# Altium PCB TestNumPad_r1.PcbDoc
Units mm, origin at the board's own origin, x right, y up, seen from the top; angles counter-clockwise.
Board outline 85.73 x 138.11 mm, 2 copper layers (Top Layer, Bottom Layer), stack 1.58 mm thick; 98 components, 71 nets, 430 pads, 19 vias.
Unrouted connection lines stored in the file: 205.
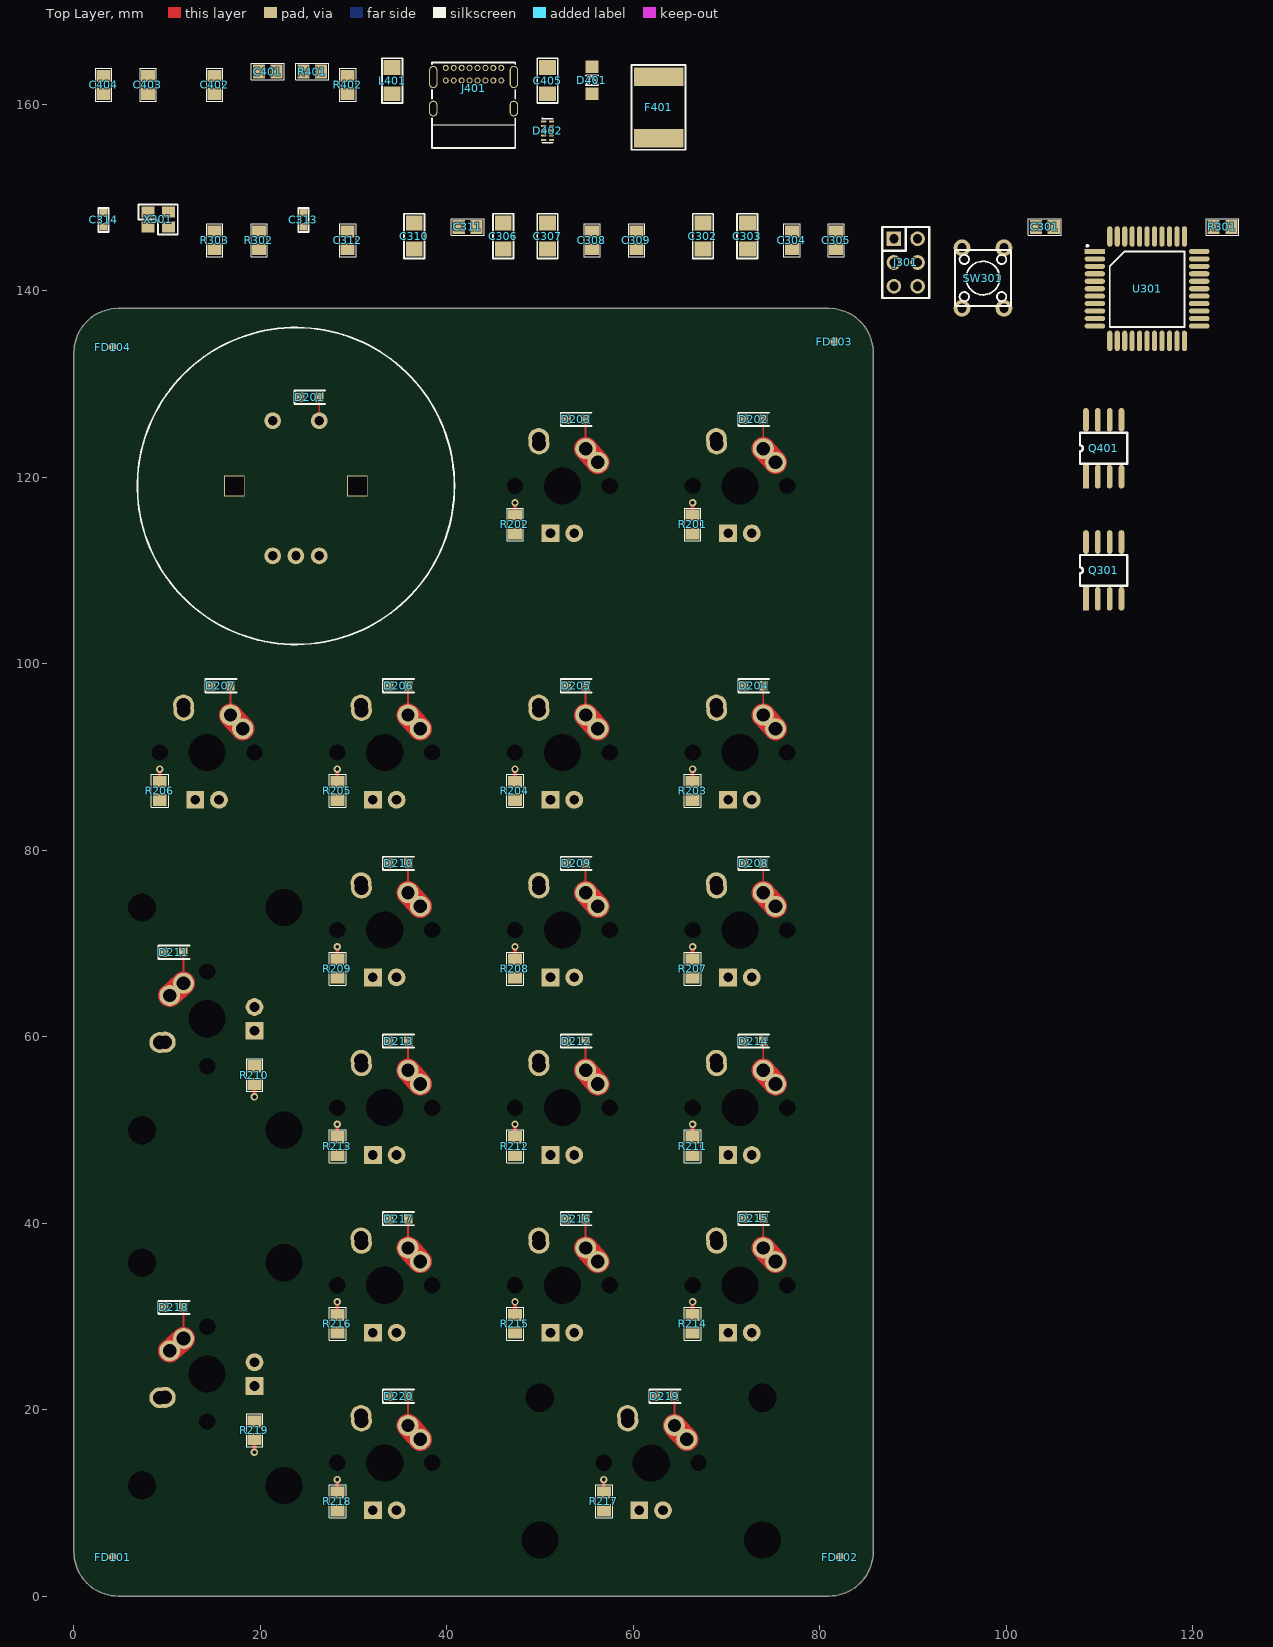
[diagram p0: Top Layer view]
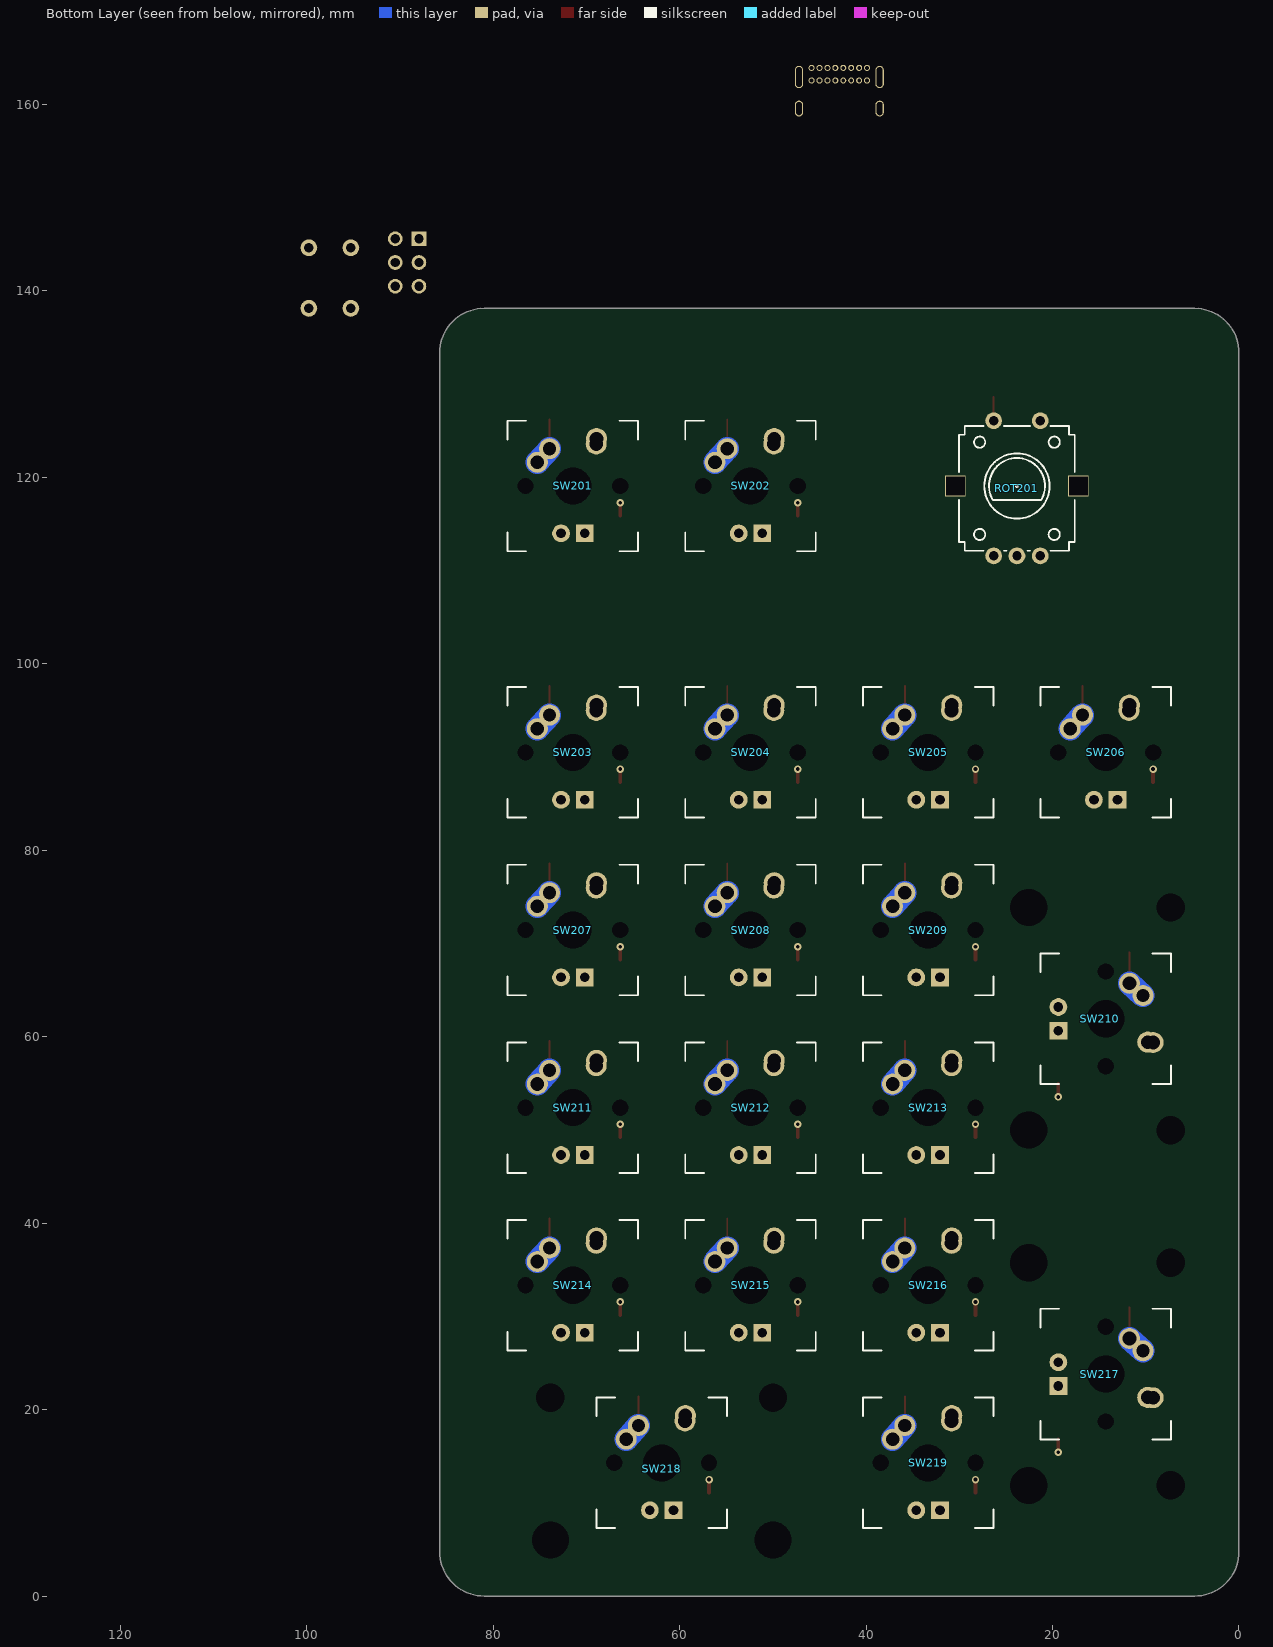
[diagram p1: Bottom Layer view, seen from below]

## Layer stack, top to bottom
Top Solder: solder mask 0.0102, Solder Resist, Dk 3.5
Top Layer: signal copper 0.0356
Dielectric 1: dielectric 1.5086, FR-4, Dk 4.8
Bottom Layer: signal copper 0.0356
Bottom Solder: solder mask 0.0102, Solder Resist, Dk 3.5

## Board outline
0,4.763 ccw(c4.763,4.763) 4.763,0 80.962,0 ccw(c80.962,4.763) 85.725,4.763 85.725,133.35 ccw(c80.962,133.35) 80.962,138.112 4.763,138.112 ccw(c4.763,133.35) 0,133.35

## Design rules (kind name [scope] priority, off if disabled: settings)
BoardOutlineClearance [All] p1: gap=0.381 ignorepadtopadclearanceinfootprint=FALSE
Clearance [All] p1: gap=0.152 ignorepadtopadclearanceinfootprint=FALSE except(0: Arc-Hole Track-Hole SMDPad-Hole THPad-Hole Via-Hole Fill-Hole Poly-Hole Region-Hole Text-Hole)
ComponentClearance ComponentClearance_Matrix [InComponentClass('U_Matrix') vs InComponentClass('U_Matrix')] p1: gap=0 collisioncheckmode=3 verticalgap=0 showdistances=FALSE
ComponentClearance [All] p2: gap=0.025 collisioncheckmode=3 verticalgap=0.025 showdistances=FALSE
DiffPairsRouting [All] p1: maxlimit=10 minlimit=0.152 mostfreqgap=0.203 toplayer_minwidth=0.152 toplayer_maxwidth=0.381 toplayer_prefwidth=0.203 bottomlayer_minwidth=0.152 bottomlayer_maxwidth=0.381 bottomlayer_prefwidth=0.203 maxuncoupledlength=12.7
HoleSize [All] p1: absolutevalues=TRUE maxlimit=6.731 minlimit=0.33 maxpercent=80.000 minpercent=20.000
HoleToHoleClearance [All] p1: gap=0.254 allowstackedmicrovias=FALSE
MinimumAnnularRing [All] p1: minimumring=0.178
MinimumSolderMaskSliver [All] p1: minsoldermaskwidth=0
PlaneClearance [All] p1: clearance=0.254
PlaneConnect [All] p1: planeconnectstyle=Direct reliefexpansion=0.406 reliefentries=4 reliefconductorwidth=0.152 reliefairgap=0.152
PolygonConnect [All] p1: connectstyle=Relief reliefconductorwidth=0.203 reliefentries=4 polygonreliefangle="90 Angle" airgapwidth=0.152
RoutingCorners [All] p1: cornerstyle=45-Degree minsetback=1.25 maxsetback=1.25
RoutingVias [All] p1: holewidth=0.4 width=0.8 viastyle="Through Hole" minholewidth=0.3 minwidth=0.6 maxholewidth=2.54 maxwidth=2.896
SilkToSilkClearance [All] p1: silktosilkclearance=0
SilkToSolderMaskClearance [IsPad] p1: minsilkscreentomaskgap=0.152 clearancetoexposedcopper=TRUE
SolderMaskExpansion [All] p1: expansion=0.075
Width [All] p1: maxlimit=4 minlimit=0.152 preferedwidth=0.2
20 further rules are at their usual default settings.

## Classes and differential pairs
component class U_USB-C_(TH): C401 C402 C403 C404 C405 D401 D402 F401 J401 L401 Q401 R401 R402
component class U_MCU: C301 C302 C303 C304 C305 C306 C307 C308 C309 C310 C311 C312 C313 C314 J301 Q301 R301 R302 R303 SW301 U301 X301
component class "Top Sheet": FD101 FD102 FD103 FD104
component class U_Matrix: D201 D202 D203 D204 D205 D206 D207 D208 D209 D210 D211 D212 D213 D214 D215 D216 D217 D218 D219 D220 R201 R202 R203 R204 R205 R206 R207 R208 R209 R210 R211 R212 R213 R214 R215 R216 R217 R218 R219 ROT201 SW201 SW202 SW203 SW204 SW205 SW206 SW207 SW208 SW209 SW210 SW211 SW212 SW213 SW214 SW215 SW216 SW217 SW218 SW219

## Components (designator, comment, footprint, x,y, rotation, side; value= is the part's Value field where it differs from the comment)
C301 "330pF" "2012C (0805)" 103.188,146.844 r0 top
C302 "10μF" "3216C (1206)" 67.469,144.463 r90 top
C303 "10μF" "3216C (1206)" 72.231,144.463 r90 top
C304 "100nF" "2012C (0805)" 76.994,144.463 r90 top
C305 "100nF" "2012C (0805)" 81.756,144.463 r90 top
C306 "10μF" "3216C (1206)" 46.038,144.463 r90 top
C307 "10μF" "3216C (1206)" 50.8,144.463 r90 top
C308 "100nF" "2012C (0805)" 55.562,144.463 r90 top
C309 "100nF" "2012C (0805)" 60.325,144.463 r90 top
C310 "10μF" "3216C (1206)" 36.512,144.463 r90 top
C311 "100nF" "2012C (0805)" 41.275,146.844 r0 top
C312 "100nF" "2012C (0805)" 29.369,144.463 r90 top
C313 "20pF" "1608C (0603)" 24.606,146.844 r90 top
C314 "20pF" "1608C (0603)" 3.175,146.844 r90 top
C401 "NF" "2012C (0805)" 19.844,163.512 r0 top
C402 "NF" "2012C (0805)" 15.081,161.131 r90 top
C403 "NF" "2012C (0805)" 7.938,161.131 r90 top
C404 "NF" "2012C (0805)" 3.175,161.131 r90 top
C405 "10μF" "3216C (1206)" 50.8,161.131 r90 top
D201 "BAS316" SOD110/SOD323 26.312,128.588 r180 top
D202 "BAS316" SOD110/SOD323 73.938,126.206 r180 top
D203 "BAS316" SOD110/SOD323 54.888,126.206 r180 top
D204 "BAS316" SOD110/SOD323 73.938,97.631 r180 top
D205 "BAS316" SOD110/SOD323 54.888,97.631 r180 top
D206 "BAS316" SOD110/SOD323 35.838,97.631 r180 top
D207 "BAS316" SOD110/SOD323 16.788,97.631 r180 top
D208 "BAS316" SOD110/SOD323 73.938,78.581 r180 top
D209 "BAS316" SOD110/SOD323 54.888,78.581 r180 top
D210 "BAS316" SOD110/SOD323 35.838,78.581 r180 top
D211 "BAS316" SOD110/SOD323 11.746,69.056 r180 top
D212 "BAS316" SOD110/SOD323 54.888,59.531 r180 top
D213 "BAS316" SOD110/SOD323 35.838,59.531 r180 top
D214 "BAS316" SOD110/SOD323 73.938,59.531 r180 top
D215 "BAS316" SOD110/SOD323 73.938,40.513 r180 top
D216 "BAS316" SOD110/SOD323 54.888,40.481 r180 top
D217 "BAS316" SOD110/SOD323 35.838,40.481 r180 top
D218 "BAS316" SOD110/SOD323 11.746,30.956 r180 top
D219 "BAS316" SOD110/SOD323 64.413,21.431 r180 top
D220 "BAS316" SOD110/SOD323 35.838,21.431 r180 top
D401 "SMF9.0CA" SOD-123FL 55.562,161.131 r90 top
D402 "TPD4E05U06DQAR" USON-10 50.8,157.162 r0 top
F401 "0ZCF0050FF2C" "7351 (2920)" 62.706,156.369 r90 top
FD101 "Fiducial" Fiducial 4.167,4.167 r0 top
FD102 "Fiducial" Fiducial 82.153,4.167 r90 top
FD103 "Fiducial" Fiducial 81.558,134.541 r90 top
FD104 "Fiducial" Fiducial 4.167,133.945 r90 top
J301 "3x2" Header-3x2-NoMod 87.947,145.574 r0 top
J401 "2073-USB4085-GF-ACT" "USB-C (2.0,TH)" 42.862,159.544 r0 top
L401 "60R" "3216 (1206)" 34.131,161.131 r90 top
Q301 "FDS4435BZ" SO8-150/200mil-GDS 108.545,106.958 r90 top
Q401 "FDS4435BZ" SO8-150/200mil-GDS 108.545,120.055 r90 top
R201 "360R" 2012R-360 66.358,113.983 r90 top
R202 "360R" 2012R-360 47.307,113.983 r90 top
R203 "360R" 2012R-360 66.358,87.307 r270 top
R204 "360R" 2012R-360 47.307,87.307 r270 top
R205 "360R" 2012R-360 28.258,87.307 r270 top
R206 "360R" 2012R-360 9.207,87.307 r270 top
R207 "360R" 2012R-360 66.358,68.257 r270 top
R208 "360R" 2012R-360 47.307,68.257 r270 top
R209 "360R" 2012R-360 28.258,68.257 r270 top
R210 "360R" 2012R-360 19.367,54.933 r90 top
R211 "360R" 2012R-360 66.358,49.207 r270 top
R212 "360R" 2012R-360 47.307,49.207 r270 top
R213 "360R" 2012R-360 28.258,49.207 r270 top
R214 "360R" 2012R-360 66.358,30.157 r270 top
R215 "360R" 2012R-360 47.307,30.157 r270 top
R216 "360R" 2012R-360 28.258,30.157 r270 top
R217 "360R" 2012R-360 56.832,11.107 r270 top
R218 "360R" 2012R-360 28.258,11.107 r270 top
R219 "360R" 2012R-360 19.367,16.833 r90 top
R301 "10K" 2012R-10K 122.237,146.844 r0 top
R302 "22R" 2012R-22 19.844,144.463 r90 top
R303 "22R" 2012R-22 15.081,144.463 r90 top
R401 "5K1" 2012R-5K1 24.606,163.512 r0 top
R402 "5K1" 2012R-5K1 29.369,161.131 r90 top
ROT201 "PEC12R-4120F-S0012" PEC12R-4xxxF-Sxxxx-NoMod 23.812,111.562 r180 bottom locked
SW201 "MX_Apls" MX-1U 71.438,119.062 r180 bottom locked
SW202 "MX_Apls" MX-1U 52.387,119.062 r180 bottom locked
SW203 "MX_Apls" MX-1U 71.438,90.487 r180 bottom locked
SW204 "MX_Apls" MX-1U 52.387,90.487 r180 bottom locked
SW205 "MX_Apls" MX-1U 33.337,90.487 r180 bottom locked
SW206 "MX_Apls" MX-1U 14.287,90.487 r180 bottom locked
SW207 "MX_Apls" MX-1U 71.438,71.438 r180 bottom locked
SW208 "MX_Apls" MX-1U 52.387,71.438 r180 bottom locked
SW209 "MX_Apls" MX-1U 33.337,71.438 r180 bottom locked
SW210 "MX_Apls" MX-2U 14.287,61.912 r270 bottom locked
SW211 "MX_Apls" MX-1U 71.438,52.387 r180 bottom locked
SW212 "MX_Apls" MX-1U 52.387,52.387 r180 bottom locked
SW213 "MX_Apls" MX-1U 33.337,52.387 r180 bottom locked
SW214 "MX_Apls" MX-1U 71.438,33.337 r180 bottom locked
SW215 "MX_Apls" MX-1U 52.387,33.337 r180 bottom locked
SW216 "MX_Apls" MX-1U 33.337,33.337 r180 bottom locked
SW217 "MX_Apls" MX-2U 14.287,23.812 r270 bottom locked
SW218 "MX_Apls" MX-2U 61.912,14.287 r180 bottom locked
SW219 "MX_Apls" MX-1U 33.337,14.287 r180 bottom locked
SW301 "RESET" SW_PB6x6 95.25,138.112 r90 top
U301 "ATMEGA32U4-AU" TQFP-44-0.8 109.5,144.22 r0 top
X301 "16.0MHz" Crystal_4-SMD 7.938,146.844 r0 top

## Footprints (in the part's own frame and the unit in brackets; to place one, negate y for a bottom-side part, rotate by r counter-clockwise, add the part's x,y. Pads: shape width x height; smd on the part's side, far side on the other; paste and mask are expansions set on the pad)
"1608C (0603)" [mm] "SMD chip component in 1608 (0603) package"
  rect 0.8x0.8 smd: 1(0,0) 2(1.5,0)
  silkscreen extent -0.55,-0.55 2.05,0.55, body extent -0.03,-0.39 1.57,0.41, height 0.9
"2012C (0805)" [mm] "2012 (0805) Footprint"
  rect 1.3x1.5 smd: 1(0,0) 2(1.9,0)
  silkscreen extent -0.81,-0.89 2.72,0.89, body extent -0.03,-0.62 1.97,0.63, height 1.25
2012R-5K1 [mm] "RESISTOR 0805"
  rect 1.3x1.5 smd: 1(0,0) 2(1.9,0)
  silkscreen extent -0.81,-0.89 2.72,0.89, body extent -0.08,-0.64 1.98,0.64, height 0.69
2012R-10K [mm] "RESISTOR 0805"
  rect 1.3x1.5 smd: 1(0,0) 2(1.9,0)
  silkscreen extent -0.81,-0.89 2.72,0.89, body extent -0.08,-0.64 1.98,0.64, height 0.69
2012R-22 [mm] "RESISTOR 0805"
  rect 1.3x1.5 smd: 1(0,0) 2(1.9,0)
  silkscreen extent -0.81,-0.89 2.72,0.89, body extent -0.08,-0.64 1.98,0.64, height 0.69
2012R-360 [mm] "RESISTOR 0805"
  rect 1.3x1.5 smd: 1(0,0) 2(1.9,0)
  silkscreen extent -0.81,-0.89 2.72,0.89, body extent -0.08,-0.64 1.98,0.64, height 0.69
"3216 (1206)" [mm] "SMD chip component in 3216 (1206) package"
  rect 1.6x1.8 smd: 1(0,0) 2(2.8,0)
  silkscreen extent -1,-1.1 3.8,1.1, body extent -0.15,-0.77 2.95,0.78, height 0.55
"3216C (1206)" [mm] "SMD chip component in 3216 (1206) package"
  rect 1.6x1.8 smd: 1(0,0) 2(2.8,0)
  silkscreen extent -1,-1.1 3.8,1.1, body extent -0.18,-0.8 3.02,0.8, height 1.8
"7351 (2920)" [mm]
  rect 2x5.3 smd: 1(0,0) 2(6.6,0)
  silkscreen extent -1.25,-2.9 7.85,2.9, body extent -0.69,-2.72 7.29,2.72, height 1.15
Crystal_4-SMD [mm]
  rect 1.4x1.15 smd mask+0.05: 1(0,0) 2(2.2,0) 3(2.2,1.6) 4(0,1.6)
  silkscreen extent -1,-0.8 3.2,2.4, body extent -0.5,-0.45 2.7,2.05, height 0.8
Fiducial [mm]
  round 1 smd paste-1 mask+0.5: ""(0,0)
Header-3x2-NoMod [mil] "0.1 Inch Header, 2 Row, 3 Way"
  rect 62x62 hole 39: 1(0,0)
  round 62 hole 39: 2(0,-100) 3(0,-200) 4(100,-200) 5(100,-100) 6(100,0)
  silkscreen extent -50,-250 150,50, body extent -51,-251 149,49, height 362
MX-1U [mm]
  round 2.25 hole 1.47: 1(-3.81,2.54) 2(2.5,4.5) 2(2.54,5.08)
  round 2.25 hole 1.42: 1(-2.5,4)
  round 1.905 hole 1.04: 3(-1.27,-5.08)
  rect 1.905x1.905 hole 1.04: 4(1.27,-5.08)
  round 1.524 hole 1.75 unplated: M(-5.08,0) M(5.08,0)
  round 1.524 hole 3.988 unplated: M(0,0)
  Top Layer lines w2.5: -2.5,4 -3.812,2.542
  Bottom Layer lines w2.5: -2.5,4 -3.812,2.542
  silkscreen extent -7,-7 7,7
MX-2U [mil]
  round 88.58 hole 57.87: 1(-150,100) 2(98.43,177.17) 2(100,200)
  round 88.58 hole 55.91: 1(-98.43,157.48)
  round 75 hole 40.94: 3(-50,-200)
  rect 75x75 hole 40.94: 4(50,-200)
  round 60 hole 68.9 unplated: M(-200,0) M(200,0)
  round 60 hole 157 unplated: M(0,0) S(-470,-325) S(470,-325)
  round 60 hole 120 unplated: S(-470,275) S(470,275)
  Top Layer lines w98.43: -98.43,157.48 -150.09,100.08
  Bottom Layer lines w98.43: -98.43,157.48 -150.09,100.08
  silkscreen extent -276,-276 276,276
PEC12R-4xxxF-Sxxxx-NoMod [mm] "Burns 12mmx13mm rotary encoder, vertical, with switch"
  round 1.8 hole 1: 1(-2.5,14.5) 2(2.5,14.5) A(-2.5,0) B(2.5,0) C(0,0)
  rect 2.2x2.3 hole 2 square: M1(-6.6,7.5) M2(6.6,7.5)
  silkscreen extent -9.6,0.55 6.2,16.3, body extent -0.2,7.3 0.2,7.7, height 0.1
SO8-150/200mil-GDS [mil]
  oval 100x24 smd: D(240,-150) D(240,-100) D(240,-50) D(240,0) G(0,-150) S(0,-50) S(0,-100)
  rect 100x24 smd: S(0,0)
  silkscreen extent 55,-175 185,25, body extent 2,-171 238,22, height 64
SOD110/SOD323 [mil]
  rect 36x40 smd: A(0,0) K(80,0)
  silkscreen extent -25,-28 105,28, body extent -10,-27 89,27, height 39
SOD-123FL [mm]
  rect 1.3x1.4 smd mask+0.07: A(0,0) K(2.9,0)
  silkscreen extent 0.95,-0.65 1.95,0.65, body extent -0.35,-0.83 3.25,0.82, height 0.95
SW_PB6x6 [mm] "6mm square tact switch"
  round 1.8 hole 1: 1(0,0) 2(6.5,0) 3(0,-4.5) 4(6.5,-4.5)
  silkscreen extent 0.25,-5.25 6.25,0.75, body extent -0.52,-5.26 7.17,0.74, height 4.95
TQFP-44-0.8 [mm] "0.8mm Pitch 44pin TQFP"
  rect 2.2x0.55 smd mask+0.05: 1(0,0)
  rrect100% 2.2x0.55 smd mask+0.05: 2(0,-0.8) 3(0,-1.6) 4(0,-2.4) 5(0,-3.2) 6(0,-4) 7(0,-4.8) 8(0,-5.6) 9(0,-6.4) 10(0,-7.2) 11(0,-8) 23(11.2,-8) 24(11.2,-7.2) 25(11.2,-6.4) 26(11.2,-5.6) 27(11.2,-4.8) 28(11.2,-4) 29(11.2,-3.2) 30(11.2,-2.4) 31(11.2,-1.6) 32(11.2,-0.8) 33(11.2,0)
  rrect100% 0.55x2.2 smd mask+0.05: 12(1.6,-9.6) 13(2.4,-9.6) 14(3.2,-9.6) 15(4,-9.6) 16(4.8,-9.6) 17(5.6,-9.6) 18(6.4,-9.6) 19(7.2,-9.6) 20(8,-9.6) 21(8.8,-9.6) 22(9.6,-9.6) 34(9.6,1.6) 35(8.8,1.6) 36(8,1.6) 37(7.2,1.6) 38(6.4,1.6) 39(5.6,1.6) 40(4.8,1.6) 41(4,1.6) 42(3.2,1.6) 43(2.4,1.6) 44(1.6,1.6)
  silkscreen extent -0.9,-8.1 9.6,0.7, body extent -0.4,-10 11.6,2, height 1.18
"USB-C (2.0,TH)" [mm] "Foortprint for the TH USB2.0 type C connector USB4085-GF-A"
  round 0.65 hole 0.4 mask+0.05: A1(-2.975,4.36) A4(-2.125,4.36) A5(-1.275,4.36) A6(-0.425,4.36) A7(0.425,4.36) A8(1.275,4.36) A9(2.125,4.36) A12(2.975,4.36) B1(2.975,3.01) B4(2.125,3.01) B5(1.275,3.01) B6(0.425,3.01) B7(-0.425,3.01) B8(-1.275,3.01) B9(-2.125,3.01) B12(-2.975,3.01)
  oval 0.9x1.7 hole 1.4 slot 0.6 at 0 deg mask+0.05: SHEILD(-4.325,0) SHEILD(4.325,0)
  oval 0.9x2.4 hole 2.1 slot 0.6 at 0 deg mask+0.05: SHEILD(-4.325,3.38) SHEILD(4.325,3.38)
  silkscreen extent -4.47,-4.25 4.47,4.92, body extent -4.51,-4.25 4.52,4.92, height 3.49
USON-10 [mm] "USON-10"
  rrect40% 0.565x0.2 smd mask+0.07: 1(-0.417,1) 2(-0.417,0.5) 4(-0.417,-0.5) 5(-0.417,-1) 6(0.417,-1) 7(0.417,-0.5) 9(0.417,0.5) 10(0.417,1)
  rrect40% 0.565x0.4 smd paste-0.02 mask+0.07: 3(-0.417,0) 8(0.417,0)
  silkscreen extent -0.55,-1.3 0.55,1.4, body extent -0.5,-1.25 0.51,1.25, height 0.53

## Part data
C301: library part "2012C-330pF (NPO)", "Capacitor MLCC 50V C0G (NP0) ±10%"
C302 C303 C306 C307 C310 C405: library part 3216C-10uF, "3216, 25V MLCC X5R CAPACITOR"
C304 C305 C308 C309 C311 C312 C401 C402 C403 C404: library part 2012C-100nF, "2012 100nF MLCC Capacitor 50V X7R"
C313 C314: library part "1608C-20pF (NPO)", "Capacitor MLCC 50V C0G (NP0) ±10%", Supplier Part Number 1=311-4221-6-ND, Supplier 1=Digi-Key
D201 D202 D203 D204 D205 D206 D207 D208 D209 D210 D211 D212 D213 D214 D215 D216 D217 D218 D219 D220: library part Diode-BAS316, "Signal diode, 100V, 250mA, 400mW"
D401: library part Diode-TVS-SMF9.0CA, "Bi-Directional TVS Diode, Vbr 10V, Vcl 15.4V, 13A, 200W"
D402: library part "Diode-ESD Array_1", "TVS Array, Low Capacitance, ESD Protection, 4IO + Pwr, (<3.0pF)"
F401: library part Poly-miniSMDC150F, "Ih-0.5A, It-1A, Im-100A, 60V POLYFUSE", Supplier Part Number 1=507-1741-1-ND, Supplier 1=Digi-Key, Supplier 2=Element14, Supplier Part Number 2=2834917
FD101 FD102 FD103 FD104: "Fiducial Mark"
J301: library part "Header 3x2", "0.1 inch, 3 Pin Receptacle, 2 Row"
J401: library part "USB-C (2.0,TH)", "USB 2.0 Type-C Connector, 16 Pin, TH + TH Case", Supplier Part Number 1=2073-USB4085-GF-ACT-ND, Supplier 1=Digi-Key
L401: library part "FERRITE BEAD", "SMD Ferrite Bead"
Q301 Q401: "P-channel, 30V, 3.2A, 120-75mOhm Enhancement MOSFET with 3.8Kv ESD Protection"
R201 R202 R203 R204 R205 R206 R207 R208 R209 R210 R211 R212 R213 R214 R215 R216 R217 R218 R219: library part 2012R-360, "RESISTOR 2012 1/4 WATT THIN FILM"
R301: library part 2012R-10K, "RESISTOR 2012 1/4 WATT THIN FILM"
R302 R303: library part 2012R-22, "RESISTOR 2012 1/4 WATT THIN FILM"
R401 R402: library part 2012R-5K1, "RESISTOR 2012 1/4 WATT THIN FILM"
ROT201: library part PEC12R-Vert-Sw, "Burns 6mm D-shaft 2-Ch Rotary Encoder with switch, 12ppr, Vertical", Supplier Part Number 1=PEC12R-4120F-S0012-ND, Supplier 1=Digi-Key
SW201 SW202 SW203 SW204 SW205 SW206 SW207 SW208 SW209 SW210 SW211 SW212 SW213 SW214 SW215 SW216 SW217 SW218 SW219: library part MX-LED-1U, "1U - MX_Alps Hybrid Footprint", Key=?
SW301: library part SWITCH_SPST_PUSH-6mm, "6mm, SPST Tact switch (DPST Only 1 Contact Used)"
U301: "Atmel ATMEGA Series Microcontroller, 16MHz, 32KB, 2.56KB Ram, 1KB EEPROM, 44 Pin, 26 IO, 2.7V-5.5V, TQFP-44", Supplier Part Number 1=C44854, Supplier 1=LCSC, Supplier 2=Digi-Key, Supplier Part Number 2=ATMEGA32U4-AU-ND
X301: library part Crystal-16M, "16MHz Crystal, 16pF, 60R ESR", Supplier Part Number 1=SER4370CT-ND, Supplier 1=Digi-Key

## Via types
v1: diameter 0.8, hole 0.4, Top Layer to Bottom Layer, tented both sides, 19 vias

## Nets (pads, with @x,y where several pads share a name; then routed paths per layer and width w, separated by ;. In a path a pad name is that pad's centre, name@x,y a point inside that pad or via, vN(x,y) a via of type N, cw(c..) or ccw(c..) an arc to the next point about the centre after c; other vN are vias at no path point)
GND: C301.2 C302.2 C303.2 C304.2 C305.2 C306.2 C307.2 C308.2 C309.2 C310.2 C311.2 C312.2 C313.1 C314.1 C401.2 C402.2 C403.2 C404.2 C405.2 J301.4 L401.2 R201.2 R202.2 R203.1 R204.1 R205.1 R206.1 R207.1 R208.1 R209.1 R210.1 R211.1 R212.1 R213.1 R214.1 R215.1 R216.1 R217.1 R218.1 R219.1 ROT201.C ROT201.M1 ROT201.M2 SW301.1 U301.5 U301.15 U301.23 U301.35 U301.43 | length 26.5
  Top Layer w0.4: R206.1 v1(9.207,88.702) ; v1(19.367,15.438) R219.1 ; v1(19.367,53.538) R210.1 ; R218.1 v1(28.258,12.502) ; R216.1 v1(28.258,31.552) ; R213.1 v1(28.258,50.602) ; R209.1 v1(28.258,69.652) ; R205.1 v1(28.258,88.702) ; R215.1 v1(47.307,31.552) ; R212.1 v1(47.307,50.602) ; R208.1 v1(47.307,69.652) ; R204.1 v1(47.307,88.702) ; R202.2 v1(47.307,117.277) ; R217.1 v1(56.832,12.502) ; R214.1 v1(66.358,31.552) ; R211.1 v1(66.358,50.602) ; R207.1 v1(66.358,69.652) ; R203.1 v1(66.358,88.702) ; R201.2 v1(66.358,117.277)
MCU_Col_1: SW201.2 SW203.2 SW207.2 SW211.2 SW214.2 U301.26
MCU_Col_2: SW202.2 SW204.2 SW208.2 SW212.2 SW215.2 SW218.2 U301.27
MCU_Col_3: SW205.2 SW209.2 SW213.2 SW216.2 SW219.2 U301.30
MCU_Col_4: ROT201.2 SW206.2 SW210.2 SW217.2 U301.12
MCU_Enc1_A: ROT201.A U301.31
MCU_Enc1_B: ROT201.B U301.32
MCU_LED_Pwr: Q301.G U301.29
MCU_MISO: J301.1 U301.11
MCU_MOSI: J301.5 U301.10
MCU_RESET: C301.1 J301.3 R301.2 SW301.3 U301.13
MCU_Row_1: D201.K D202.K D203.K U301.18
MCU_Row_2: D204.K D205.K D206.K D207.K U301.19
MCU_Row_3: D208.K D209.K D210.K D211.K U301.20
MCU_Row_4: D212.K D213.K D214.K U301.21
MCU_Row_5: D215.K D216.K D217.K U301.25
MCU_Row_6: D218.K D219.K D220.K U301.22
MCU_SCK: J301.2 U301.9
MCU_USB+: R302.1 U301.4
MCU_USB-: R303.1 U301.3
NetC312_1: C312.1 U301.6
NetC313_2: C313.2 U301.16 X301.3
NetC314_2: C314.2 U301.17 X301.1
NetD201_A: D201.A ROT201.1 | length 2.5
  Top Layer w0.2: ROT201.1 D201.A
NetD202_A: D202.A SW201.1 | length 3.1
  Top Layer w0.2: SW201.1@73.938,123.062 D202.A
NetD203_A: D203.A SW202.1 | length 3.1
  Top Layer w0.2: SW202.1@54.888,123.062 D203.A
NetD204_A: D204.A SW203.1 | length 3.1
  Top Layer w0.2: SW203.1@73.938,94.487 D204.A
NetD205_A: D205.A SW204.1 | length 3.1
  Top Layer w0.2: SW204.1@54.888,94.487 D205.A
NetD206_A: D206.A SW205.1 | length 3.1
  Top Layer w0.2: SW205.1@35.838,94.487 D206.A
NetD207_A: D207.A SW206.1 | length 3.1
  Top Layer w0.2: SW206.1@16.788,94.487 D207.A
NetD208_A: D208.A SW207.1 | length 3.1
  Top Layer w0.2: SW207.1@73.938,75.437 D208.A
NetD209_A: D209.A SW208.1 | length 3.1
  Top Layer w0.2: SW208.1@54.888,75.437 D209.A
NetD210_A: D210.A SW209.1 | length 3.1
  Top Layer w0.2: SW209.1@35.838,75.437 D210.A
NetD211_A: D211.A SW210.1 | length 3.3
  Top Layer w0.2: D211.A 11.747,69.054 SW210.1@11.747,65.722
NetD212_A: D212.A SW212.1 | length 3.1
  Top Layer w0.2: SW212.1@54.888,56.387 D212.A
NetD213_A: D213.A SW213.1 | length 3.1
  Top Layer w0.2: SW213.1@35.838,56.387 D213.A
NetD214_A: D214.A SW211.1 | length 3.1
  Top Layer w0.2: SW211.1@73.938,56.387 D214.A
NetD215_A: D215.A SW214.1 | length 3.2
  Top Layer w0.2: SW214.1@73.938,37.337 D215.A
NetD216_A: D216.A SW215.1 | length 3.1
  Top Layer w0.2: SW215.1@54.888,37.337 D216.A
NetD217_A: D217.A SW216.1 | length 3.1
  Top Layer w0.2: SW216.1@35.838,37.337 D217.A
NetD218_A: D218.A SW217.1 | length 3.3
  Top Layer w0.2: D218.A 11.747,30.954 SW217.1@11.747,27.622
NetD219_A: D219.A SW218.1 | length 3.1
  Top Layer w0.2: SW218.1@64.413,18.287 D219.A
NetD220_A: D220.A SW219.1 | length 3.1
  Top Layer w0.2: SW219.1@35.838,18.287 D220.A
NetD401_A: D401.A F401.2 Q401.S
NetJ401_A5: J401.A5 R402.1
NetJ401_B5: J401.B5 R401.1
NetR201_1: R201.1 SW201.4
NetR202_1: R202.1 SW202.4
NetR203_2: R203.2 SW203.4
NetR204_2: R204.2 SW204.4
NetR205_2: R205.2 SW205.4
NetR206_2: R206.2 SW206.4
NetR207_2: R207.2 SW207.4
NetR208_2: R208.2 SW208.4
NetR209_2: R209.2 SW209.4
NetR210_2: R210.2 SW210.4
NetR211_2: R211.2 SW211.4
NetR212_2: R212.2 SW212.4
NetR213_2: R213.2 SW213.4
NetR214_2: R214.2 SW214.4
NetR215_2: R215.2 SW215.4
NetR216_2: R216.2 SW216.4
NetR217_2: R217.2 SW218.4
NetR218_2: R218.2 SW219.4
NetR219_2: R219.2 SW217.4
SHEILD: C401.1 C402.1 C403.1 C404.1 D401.K D402.3 D402.6 J401.A1 J401.A12 J401.B1 J401.B12 J401.SHEILD L401.1 Q401.G R401.2 R402.2
"USB +": D402.5 J401.A6 J401.B6 R302.2
"USB -": D402.1 J401.A7 J401.B7 R303.2
VBUS: C302.1 C303.1 C304.1 C305.1 C306.1 C307.1 C308.1 C309.1 C310.1 C311.1 C405.1 J301.6 Q301.S Q401.D R301.1 U301.2 U301.7 U301.14 U301.24 U301.34 U301.44
Vin: F401.1 J401.A4 J401.A9 J401.B4 J401.B9
VLED: Q301.D SW201.3 SW202.3 SW203.3 SW204.3 SW205.3 SW206.3 SW207.3 SW208.3 SW209.3 SW210.3 SW211.3 SW212.3 SW213.3 SW214.3 SW215.3 SW216.3 SW217.3 SW218.3 SW219.3
pads on no net: D402.2 D402.4 D402.7 D402.8 D402.9 D402.10 FD101. FD102. FD103. FD104. J401.A8 J401.B8 SW201.M SW202.M SW203.M SW204.M SW205.M SW206.M SW207.M SW208.M SW209.M SW210.M SW210.S SW211.M SW212.M SW213.M SW214.M SW215.M SW216.M SW217.M SW217.S SW218.M SW218.S SW219.M SW301.2 SW301.4 U301.1 U301.8 U301.28 U301.33 U301.36 U301.37 U301.38 U301.39 U301.40 U301.41 U301.42 X301.2 X301.4

## Silkscreen, mask and mechanical layers (free items; w line width, h text height)
Top Overlay:
  circle w0.2: c23.812,119.062 r17
Board Outline:
  lines w0.1: 0,4.763 ccw(c4.763,4.763) 4.763,0 80.962,0 ccw(c80.962,4.763) 85.725,4.763 85.725,133.35 ccw(c80.962,133.35) 80.962,138.112 4.763,138.112 ccw(c4.763,133.35) 0,133.35 0,4.763
  lines w0.254: 0,160.641 0,160.641